# EAGLE board FD Capacitance Sensor v06 - 9 (EAGLE 9.5.2)
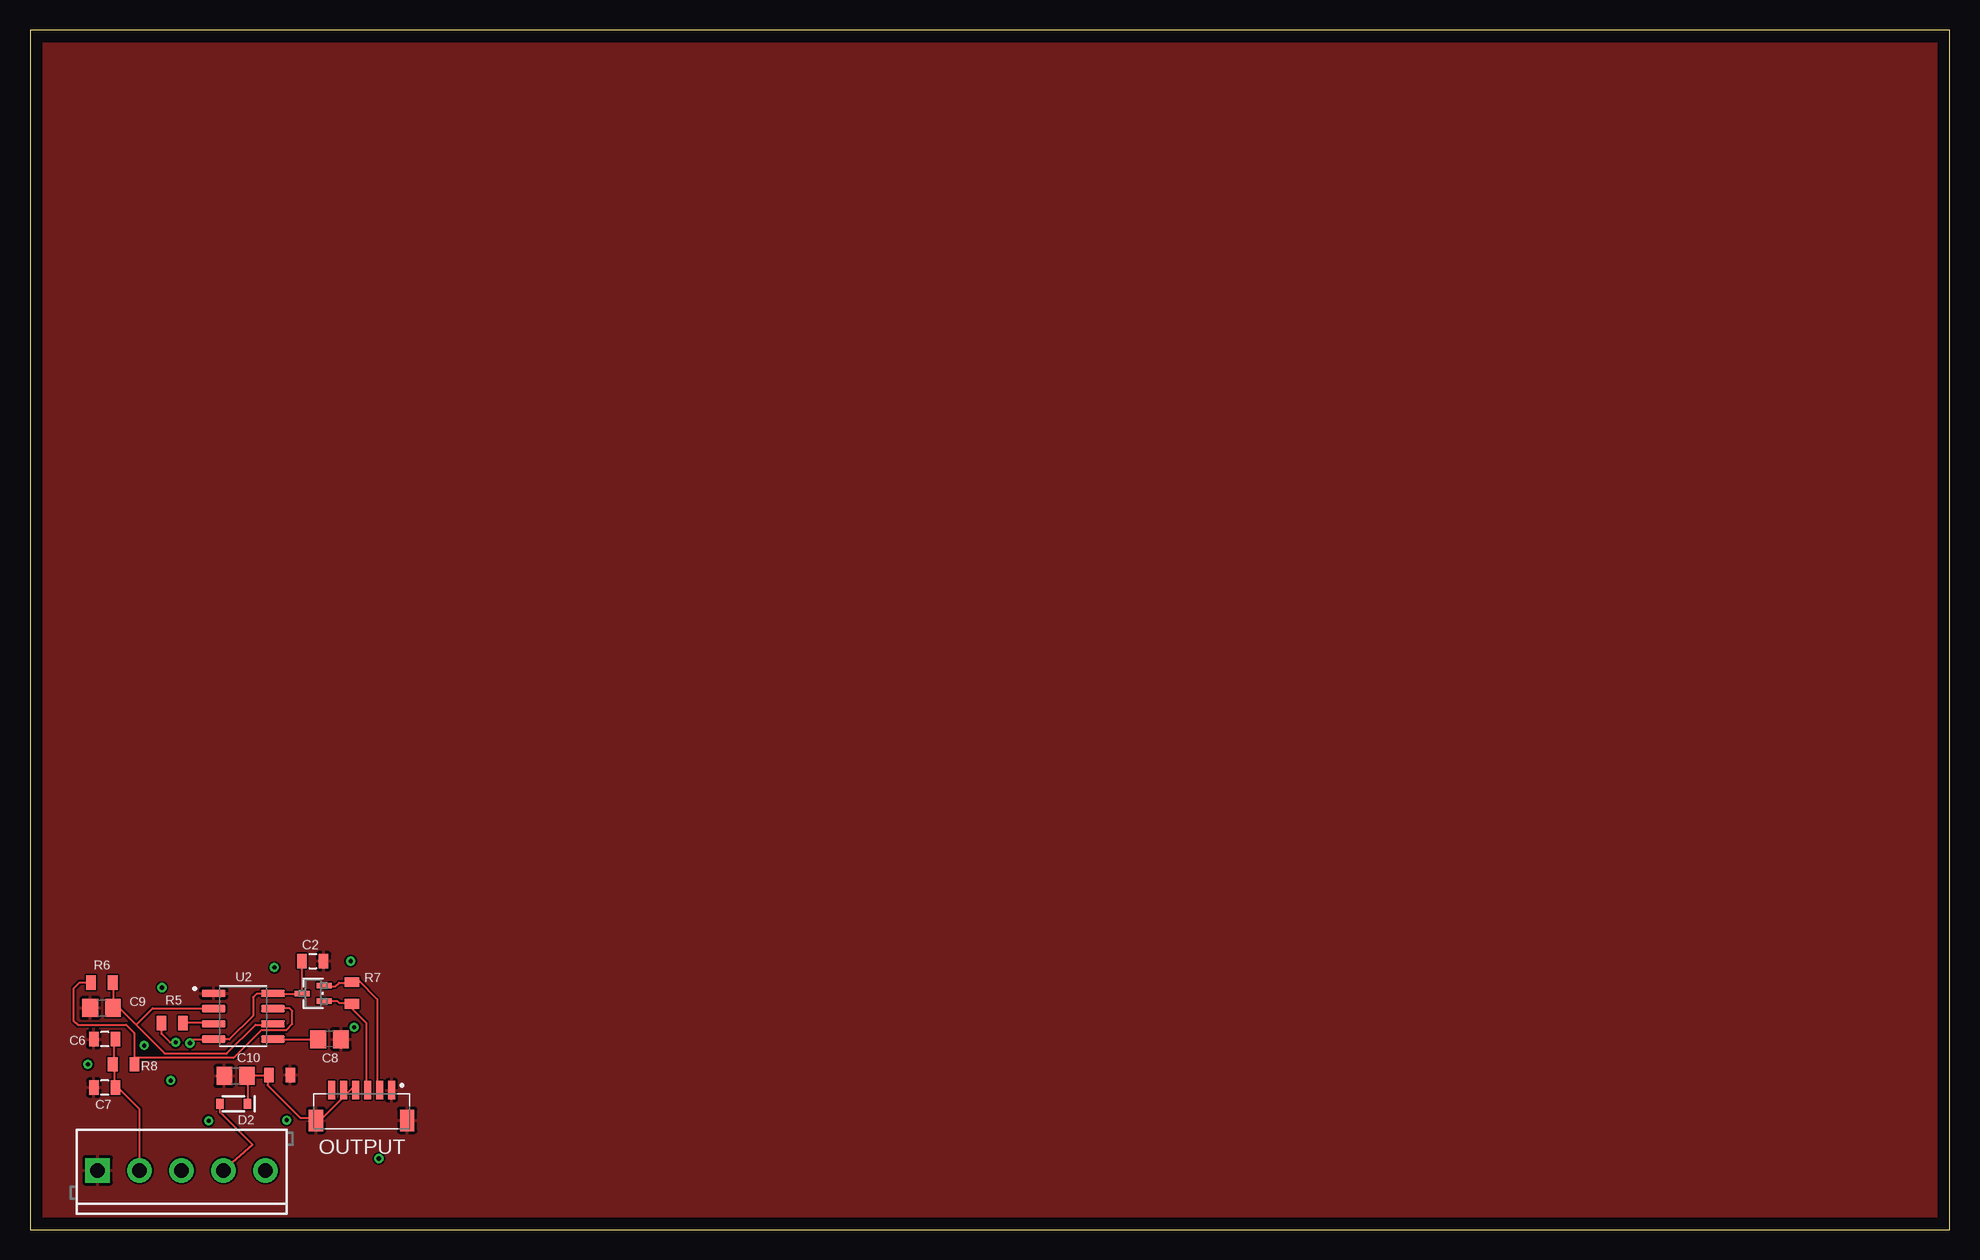
[diagram p0: board, top side]
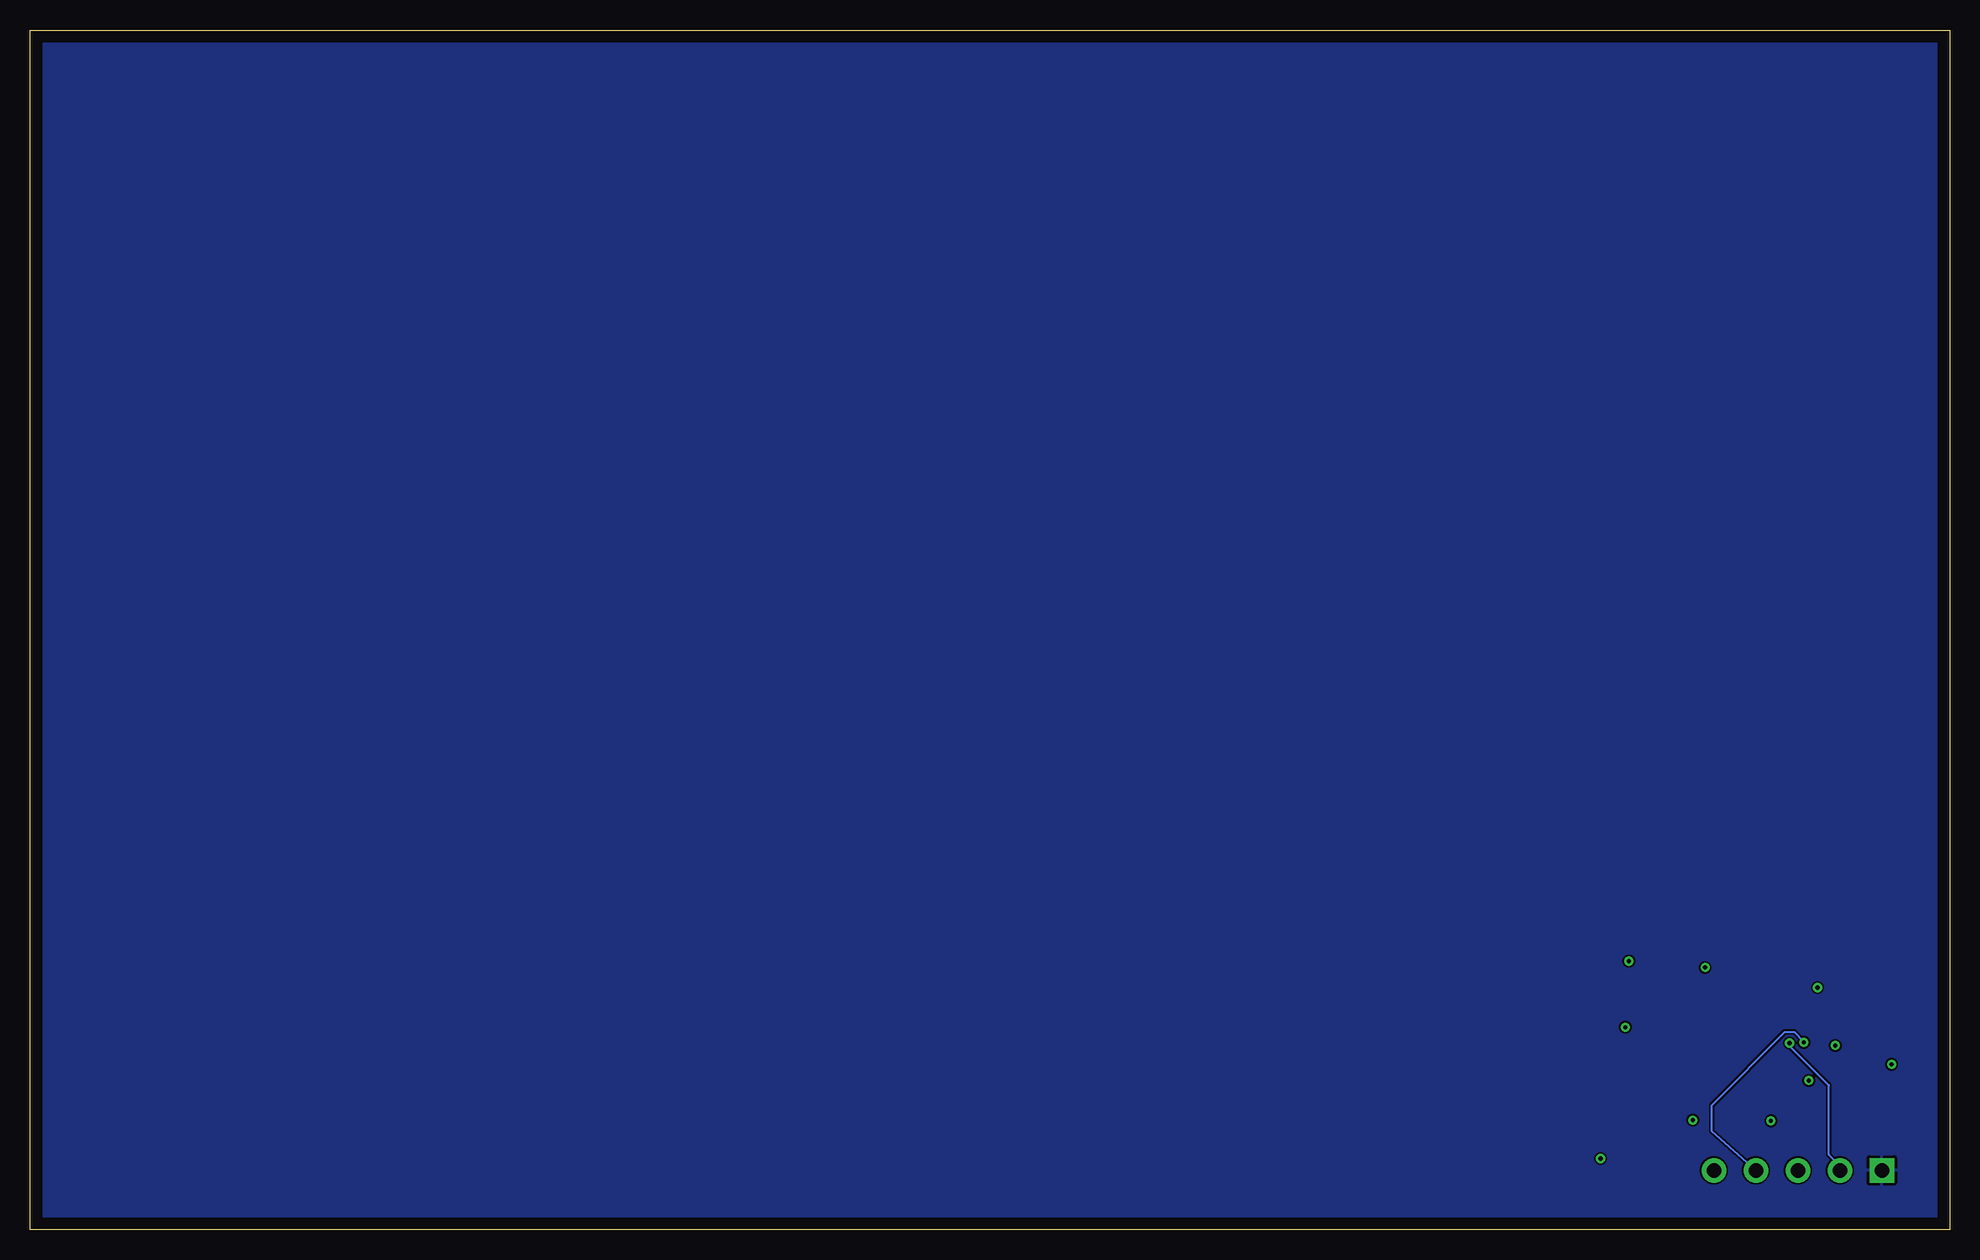
[diagram p1: board, bottom side, seen from below]

Size 160 x 100 mm. Coordinates in mm from the lower left corner, seen from the top.
Outline: 0,0 160,0 160,100 0,100 0,0
Copper layers (1*16): Top 0.035mm / dielectric 1.5mm / Bottom 0.035mm
Design rules "default": minimum track width 6mil, minimum drill 0.35mm, track to track 6mil, track to pad 6mil, pad to pad 6mil, via to via 6mil, smd to smd 6mil, copper to edge 40mil, drill to drill 6mil, minimum pad ring 10mil, minimum via ring 8mil, stop-mask expansion 4mil, vias tented up to drill 0mil, thermal gap 10mil

## Footprints (pad centres in the part's own frame; a part is rotated, then mirrored left to right if it is on the bottom)
0805@1 = smd 0.8 x 1.2: 1 -0.9,0; 2 0.9,0
C0805 = smd 1.3 x 1.5: 1 -0.95,0; 2 0.95,0
SOD-323 = smd 0.63 x 0.83: A 1.15,0; C -1.15,0
SCREWTERMINAL-3.5MM-5 = drill 1.2 pad 2.032 square: 1 0,0 | drill 1.2 pad 2.032: 2 3.5,0; 3 7,0; 4 10.5,0; 5 14,0
JST_BM06B-SRSS-TB(LF)(SN) = smd 0.6 x 1.55: 1 -2.5,-2.525; 2 -1.5,-2.525; 3 -0.5,-2.525; 4 0.5,-2.525; 5 1.5,-2.525; 6 2.5,-2.525 | smd 1.2 x 1.8: S1 -3.8,0; S2 3.8,0
0805 = smd 0.8 x 1.2: 1 -0.9,0; 2 0.9,0
SOT_101PT1_ONS = smd 0.457 x 1.27: 1 -0.65,-0.914; 2 0.65,-0.914; 3 0,0.914
SOIC127P599X175-8N = smd 1.97 x 0.6: 1 -2.47,1.905; 2 -2.47,0.635; 3 -2.47,-0.635; 4 -2.47,-1.905; 5 2.47,-1.905; 6 2.47,-0.635; 7 2.47,0.635; 8 2.47,1.905

## Placement (x,y rotation side)
C2  1uF  [0805@1]  23.57,22.38 0 top
C6  10nF  [0805@1]  6.22,15.88 180 top
C7  0.1uF  [0805@1]  6.22,11.84 180 top
C8  10nf  [C0805]  24.97,15.88 180 top
C9  470pf  [C0805]  5.97,18.47 0 top
C10  1uF  [C0805]  17.14,12.8 0 top
D2  250mA/100V  [SOD-323]  16.97,10.46 180 top
FRAME1  FRAME-LETTERNO_PACKAGE  [DUMMY]  46.99,46.99 0 top
J1  [SCREWTERMINAL-3.5MM-5]  5.64,4.93 0 top
OUTPUT  BM06B-SRSS-TBT(LF)(SN)  [JST_BM06B-SRSS-TB(LF)(SN)]  27.64,9.09 180 top
R5  10k  [0805]  11.86,17.22 180 top
R6  1k  [0805]  5.99,20.6 180 top
R7  100k  [0805]  26.85,19.71 90 top
R8  330  [0805]  7.8,13.77 180 top
R9  1M  [0805]  20.8,12.88 180 top
U1  NTS4101PT1  [SOT_101PT1_ONS]  23.6,19.68 90 top
U2  TLC555CD  [SOIC127P599X175-8N]  17.78,17.78 0 top

## Library data of the parts
C2 = Custom Components; HOUSEPART: yes; MPN: MF-CAP-0805-1uF; POPULATE: 1; URL: https://factory.macrofab.com/part/MF-CAP-0805-1uF
C6 = Custom Components; DIGIKEY: 399-C0805X103K1RAC3316CT-ND; HOUSEPART: NO; MPN: C0805X103K1RAC3316; POPULATE: 1; URL: https://www.digikey.com/en/products/detail/kemet/C0805X103K1RAC3316/10315780
C7 = Custom Components; HOUSEPART: YES; MPN: MF-CAP-0805-0.1uF; POPULATE: 1; URL: https://factory.macrofab.com/part/MF-CAP-0805-0.1uF
C8-C10 = rcl
D2 = Custom Components; MPN: BAS16HT1G
FRAME1 = SparkFun-Aesthetics; DESIGNER: Nobody; VERSION: v01
J1 = SparkFun-Connectors; PROD_ID: Combine 8288+8399
OUTPUT = Custom Components; MPN: BM06B-SRSS-TBT(LF)(SN); POPULATE: 1
R5 = Custom Components; MPN: MF-RES-0805-10K; POPULATE: 1; URL: https://factory.macrofab.com/part/MF-RES-0805-10K
R6 = Custom Components; HOUSEPART: YES; MPN: MF-RES-0805-1K; POPULATE: 1; URL: https://factory.macrofab.com/part/MF-RES-0805-1k
R7 = Custom Components; MPN: MF-RES-0805-100K; POPULATE: 1; URL: https://factory.macrofab.com/part/MF-RES-0805-100K
R8 = Custom Components; HOUSEPART: YES; MPN: MF-RES-0805-330; POPULATE: 1
R9 = Custom Components; MPN: MF-RES-0805-1K; POPULATE: 1; URL: https://factory.macrofab.com/part/MF-RES-0805-1k
U1 = Custom Components; DATASHEET: https://datasheet.octopart.com/NTS4101PT1-ON-Semiconductor-datasheet-139013286.pdf; MANUFACTURER_PART_NUMBER: NTS4101PT1; SOURCELIBRARY: ON_Semiconductor_2020-03-06; VENDOR: ON Semiconductor
U2 = Custom Components; DESCRIPTION: 2.1-MHz, 250-A, Low-Power Timer 8-SOIC 0 to 70; DIGI-KEY_PART_NUMBER: 296-52992-ND; MF: Texas Instruments; MP: TLC555CD; PACKAGE: SOIC-8 Texas Instruments; PURCHASE-URL: https://pricing.snapeda.com/search/part/TLC555CD/?ref=eda

## Nets
!EN: OUTPUT.3 R7.1 U1.1
+3V3: OUTPUT.2 R7.2 U1.2
GND: C2.2 C6.2 C7.2 C8.1 C9.1 C10.1 J1.1 OUTPUT.1 OUTPUT.S1 OUTPUT.S2 R9.1 U2.1
N$1: C8.2 U2.5
N$5: R5.1 U2.3
N$8: C9.2 R6.1 U2.2 U2.6
N$9: R6.2 R8.1 U2.7
NC: OUTPUT.6
OUTPUT1: C10.2 D2.C OUTPUT.4 R9.2
OUTPUT2: OUTPUT.5
SENSOR1: D2.A J1.4 R5.2
SENSOR2: J1.5
SHEILD: J1.3
VCC: C2.1 C6.1 C7.1 J1.2 R8.2 U1.3 U2.4 U2.8

## Tracks (layer width: path | path; a pad name or v marks a point on that pad's centre or on a via)
!EN
  Top 0.152: U1.1 24.54,19.05 25.6,19.05 25.76,18.9 26.82,18.9 R7.1 26.82,18.75 26.82,18.44 28.04,17.22 28.04,11.66 OUTPUT.3
+3V3
  Top 0.152: U1.2 24.54,20.27 25.45,20.27 25.76,20.57 26.82,20.57 R7.2 26.98,20.73 27.43,20.73 28.96,19.2 28.96,11.67 OUTPUT.2
GND
  pour Top: -3.81,-5.08 -3.81,106.68 168.91,106.68 168.91,104.14 168.91,-6.35 -3.81,-6.35
  pour Bottom: -2.01,-4.62 -2.01,103.43 164.13,103.43 164.13,-4.78 -2.01,-4.78
N$1
  Top 0.152: 20.27,15.85 U2.5 C8.2
N$2  (via drill 0.35)
  other vias: 11.73,12.42
N$3  (via drill 0.35)
  other vias: 11,20.17
N$4  (via drill 0.35)
  other vias: 27.03,16.87
N$5
  Top 0.152: R5.1 15.24,17.22 U2.3
N$6  (via drill 0.35)
  other vias: 29.08,5.92
N$7  (via drill 0.35)
  other vias: 21.39,9.12
N$8
  Top 0.152: 8.84,17.07 7.47,18.44 7.01,18.44 C9.2 6.92,20.57 R6.1 | 8.84,17.07 11.23,14.68 16.41,14.68 18.8,17.07 20.12,17.07 U2.6 | 8.84,17.07 10.21,18.44 15.24,18.44 U2.2
N$9
  Top 0.152: 8.69,14.02 8.69,13.87 R8.1 8.69,14.02 | U2.7 20.27,18.44 21.64,18.44 21.87,18.21 21.87,17.14 21.34,16.61 19.28,16.61 16.97,14.3 8.69,14.3 | 8.69,14.3 8.69,16.38 8,17.07 3.96,17.07 3.66,17.37 3.66,20.12 4.14,20.6 R6.2 | 8.69,14.3 8.69,14.02
N$10  (via drill 0.35)
  other vias: 4.83,13.77
N$11  (via drill 0.35)
  other vias: 14.88,9.07
N$12  (via drill 0.35)
  other vias: 9.53,15.34
N$13  (via drill 0.35)
  other vias: 26.72,22.38
N$14  (via drill 0.35)
  other vias: 20.37,21.84
OUTPUT1
  Top 0.152: 18.14,12.8 19.83,12.8 R9.2 19.81,12.78 19.81,12.04 22.53,9.32 24.41,9.32 26.98,11.89 27.14,11.85 OUTPUT.4 | 18.14,12.8 18.14,12.5 | 18.14,12.8 C10.2 18.14,12.5 | 18.14,12.5 18.14,10.52 D2.C
SENSOR1  (via drill 0.35)
  Top 0.152: v12.14,15.6 11.68,15.6 10.97,16.31 10.97,17.22 R5.2 | D2.A 15.85,10.36 15.85,9.75 18.54,7.06 J1.4
  Bottom 0.152: v12.14,15.6 12.19,15.7 12.95,16.46 13.72,16.46 19.81,10.36 19.81,8.18 J1.4
VCC  (via drill 0.35)
  Top 0.152: C2.1 22.71,22.25 22.71,19.81 U1.3 22.55,19.66 20.27,19.66 U2.8 20.12,19.66 18.9,19.66 18.59,19.36 18.59,17.83 16.61,15.85 15.39,15.85 U2.4 15.24,15.85 13.72,15.85 | C6.1 7.01,15.85 7.01,13.87 R8.2 7.01,13.72 7.01,11.89 C7.1 7.32,11.84 9.14,10.01 J1.2 | 13.64,15.85 13.72,15.85 | 13.72,15.85 13.41,15.54 v13.34,15.54
  Bottom 0.152: 13.13,15.34 v13.34,15.54 13.26,15.39 13.26,15.24 10.06,12.04 10.06,6.25 9.14,5.33 9.14,5.03 J1.2